# EAGLE board DESIGN7MP_Board (EAGLE 9.3.2)
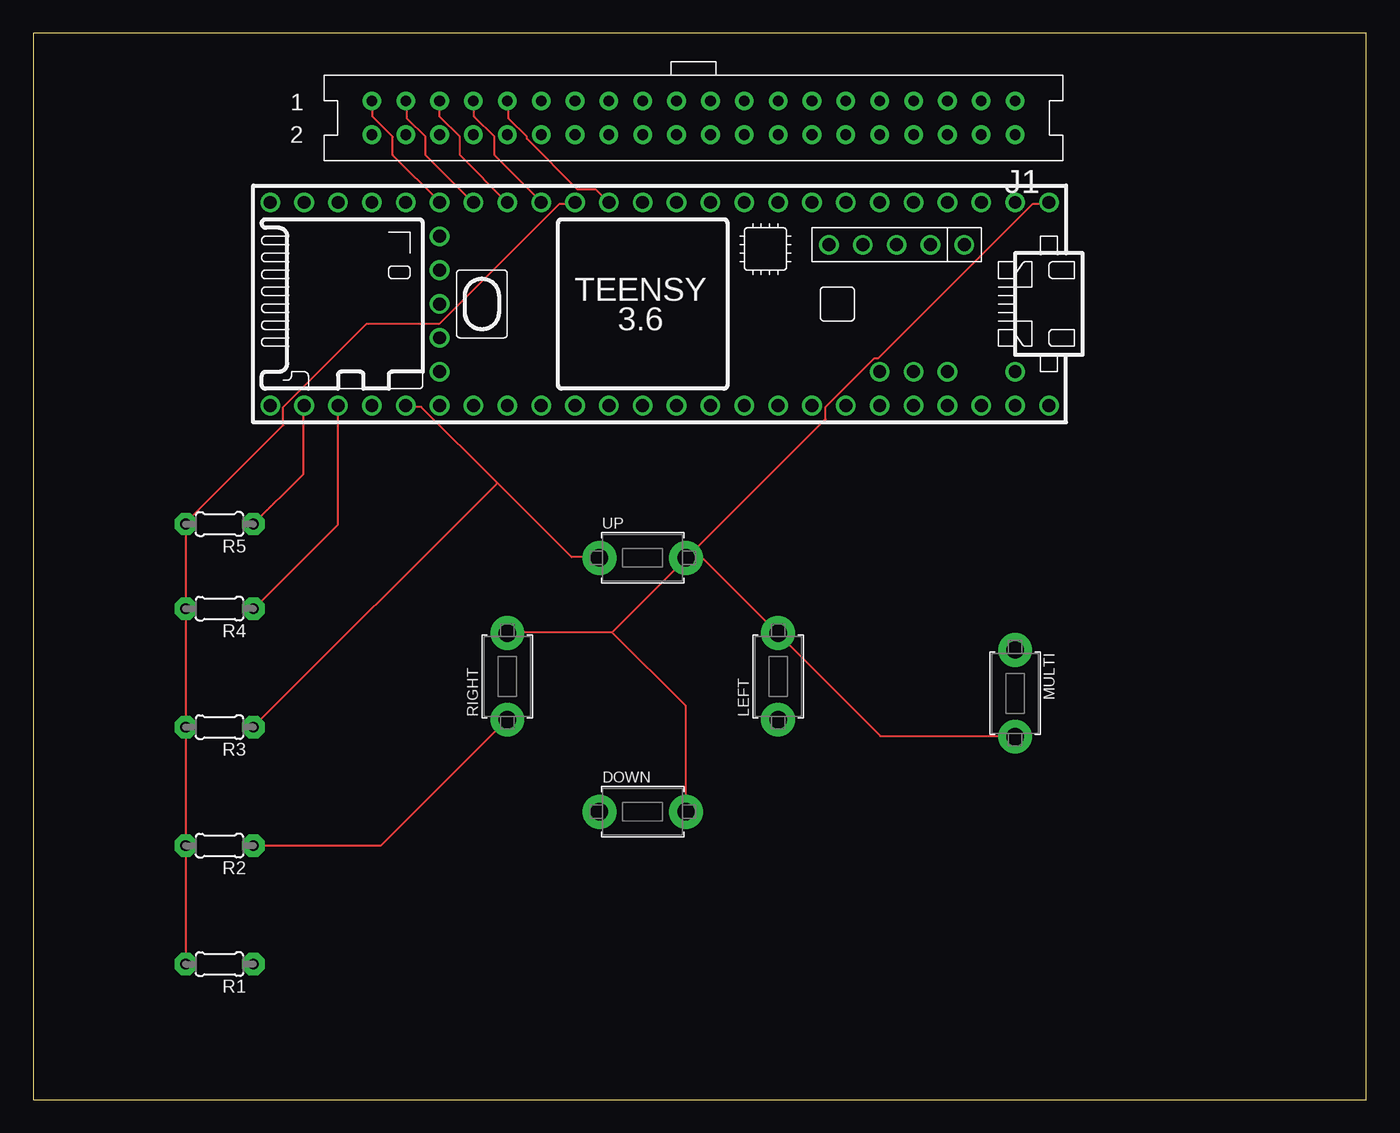
[diagram p0: board, top side]
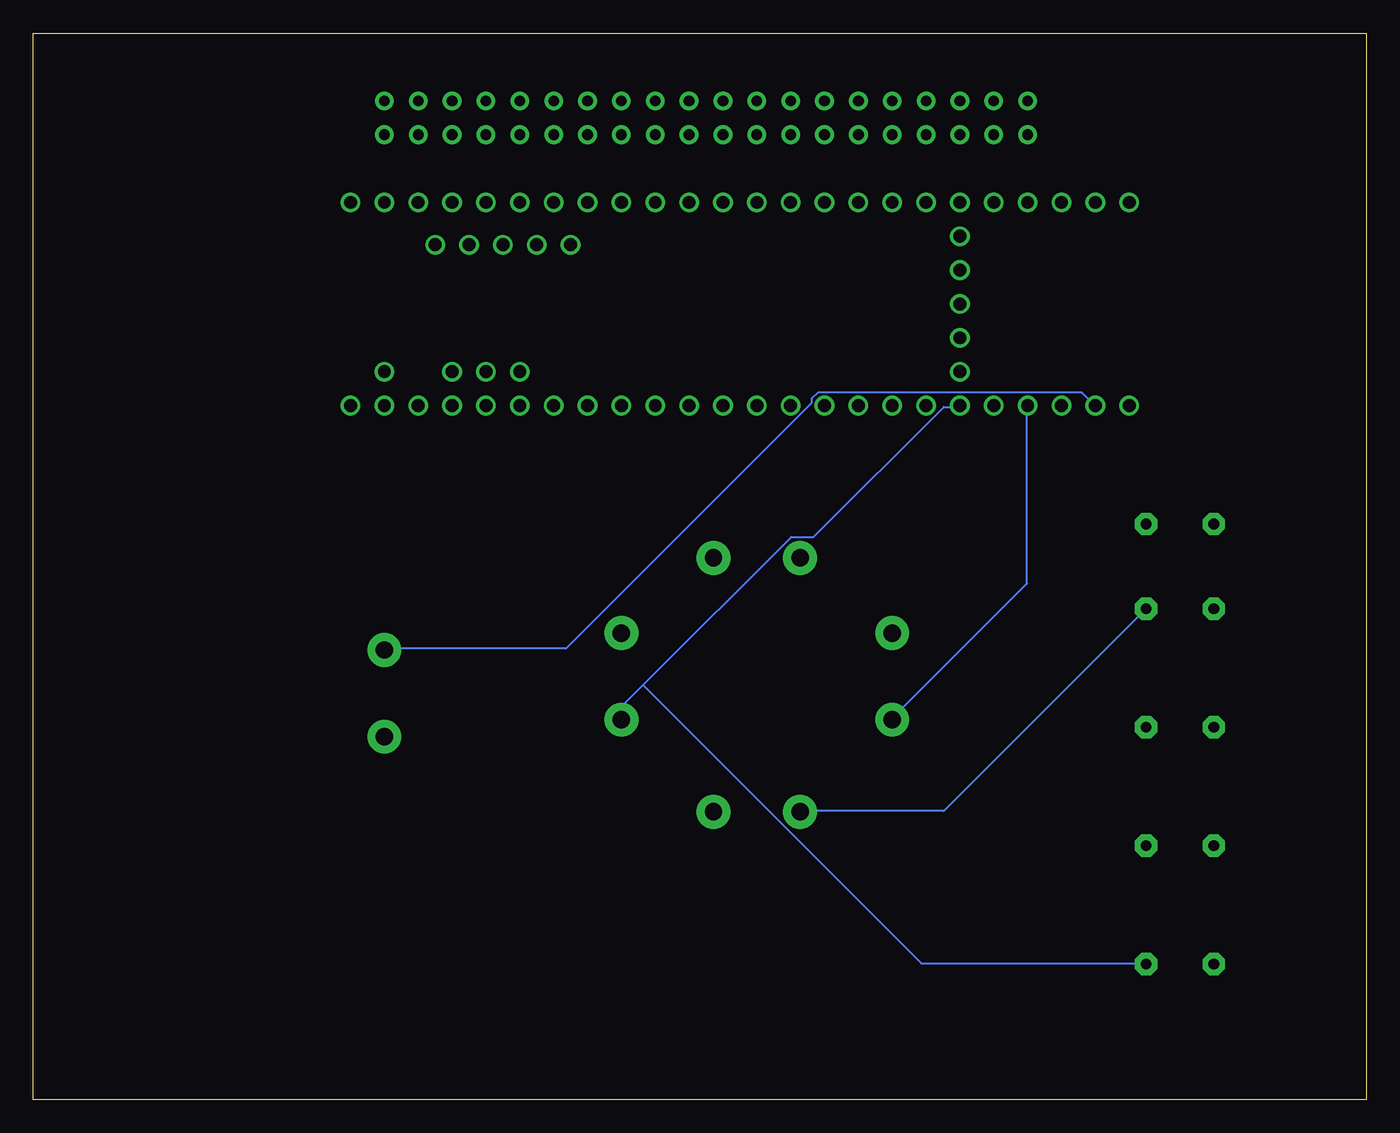
[diagram p1: board, bottom side, seen from below]

Size 100 x 80 mm. Coordinates in mm from the lower left corner, seen from the top.
Outline: 0,0 100,0 100,80 0,80 0,0
Copper layers (1*16): Top 0.035mm / dielectric 1.5mm / Bottom 0.035mm
Design rules "default": minimum track width 6mil, minimum drill 0.35mm, track to track 6mil, track to pad 6mil, pad to pad 6mil, via to via 6mil, smd to smd 6mil, copper to edge 40mil, drill to drill 6mil, minimum pad ring 10mil, minimum via ring 8mil, stop-mask expansion 4mil, vias tented up to drill 0mil, thermal gap 10mil

## Footprints (pad centres in the part's own frame; a part is rotated, then mirrored left to right if it is on the bottom)
TACT_PANA-EVQ = drill 1.3 pad 2.54: P$1 -3.25,0; P$2 3.25,0
S40V = drill 0.8 pad 1.4: 1 24.13,-1.27; 2 24.13,1.27; 3 21.59,-1.27; 4 21.59,1.27; 5 19.05,-1.27; 6 19.05,1.27; 7 16.51,-1.27; 8 16.51,1.27; 9 13.97,-1.27; 10 13.97,1.27; 11 11.43,-1.27; 12 11.43,1.27; 13 8.89,-1.27; 14 8.89,1.27; 15 6.35,-1.27; 16 6.35,1.27; 17 3.81,-1.27; 18 3.81,1.27; 19 1.27,-1.27; 20 1.27,1.27; 21 -1.27,-1.27; 22 -1.27,1.27; 23 -3.81,-1.27; 24 -3.81,1.27; 25 -6.35,-1.27; 26 -6.35,1.27; 27 -8.89,-1.27; 28 -8.89,1.27; 29 -11.43,-1.27; 30 -11.43,1.27; 31 -13.97,-1.27; 32 -13.97,1.27; 33 -16.51,-1.27; 34 -16.51,1.27; 35 -19.05,-1.27; 36 -19.05,1.27; 37 -21.59,-1.27; 38 -21.59,1.27; 39 -24.13,-1.27; 40 -24.13,1.27
0204/5 = drill 0.813 pad 1.676 octagon: 1 -2.54,0; 2 2.54,0
TEENSY_3.5/3.6 = drill 0.965: 0/RX -25.4,-7.62; 1/TX -22.86,-7.62; 2 -20.32,-7.62; 3/CANTX -17.78,-7.62; 3V3 7.62,-7.62; 3V3_2 17.78,-2.54; 3V3_LO -22.86,7.62; 4/CANRX -15.24,-7.62; 5 -12.7,-7.62; 6 -10.16,-7.62; 7 -7.62,-7.62; 8 -5.08,-7.62; 9/CS -2.54,-7.62; 10/CS 0,-7.62; 11/MOSI 2.54,-7.62; 12/MISO 5.08,-7.62; 13/SCK 5.08,7.62; 14/A0 2.54,7.62; 15/A1 0,7.62; 16/A2 -2.54,7.62; 17/A3 -5.08,7.62; 18/A4/SDA -7.62,7.62; 19/A5/SCL -10.16,7.62; 20/A6 -12.7,7.62; 21/A7 -15.24,7.62; 21/DAC0 12.7,7.62; 22/A8 -17.78,7.62; 23/A9 -20.32,7.62; 24 10.16,-7.62; 25 12.7,-7.62; 26 15.24,-7.62; 27 17.78,-7.62; 28 20.32,-7.62; 29 22.86,-7.62; 30 25.4,-7.62; 31/A12 27.94,-7.62; 32/A13 30.48,-7.62; 33/A14 30.48,7.62; 34/A15 27.94,7.62; 35/A16 25.4,7.62; 36/A17 22.86,7.62; 37/A18 20.32,7.62; 38/A19 17.78,7.62; 39/A20 15.24,7.62; A10 -17.78,5.08; A11 -15.24,5.08; A22/DAC1 10.16,7.62; AGND -25.4,7.62; AREF -20.32,5.08; GND -27.94,-7.62; GND2 7.62,7.62; GND3 17.78,0; PROG 17.78,2.54; RESET 17.78,5.08; U5V -21.59,-4.445; UD+ -16.51,-4.445; UD- -19.05,-4.445; UGND1 -13.97,-4.445; UGND2 -11.43,-4.445; VBAT 17.78,-5.08; VIN -27.94,7.62; VUSB -25.4,5.08

## Placement (x,y rotation side)
DOWN  [TACT_PANA-EVQ]  45.72,21.59 0 top
J1  [S40V]  49.53,73.66 180 top
LEFT  [TACT_PANA-EVQ]  55.88,31.75 90 top
MULTI  [TACT_PANA-EVQ]  73.66,30.48 270 top
R1  27k  [0204/5]  13.97,10.16 180 top
R2  27k  [0204/5]  13.97,19.05 180 top
R3  27k  [0204/5]  13.97,27.94 180 top
R4  27k  [0204/5]  13.97,36.83 180 top
R5  27k  [0204/5]  13.97,43.18 180 top
RIGHT  [TACT_PANA-EVQ]  35.56,31.75 90 top
U$1  TEENSY_3.5/3.6  [TEENSY_3.5/3.6]  48.26,59.69 180 top
UP  [TACT_PANA-EVQ]  45.72,40.64 0 top

## Library data of the parts
DOWN LEFT MULTI R1-R5 RIGHT UP = adafruit
J1 = con-3m-skt-header
U$1 = Teensy356

## Nets
N$1: R1.2 R2.2 R3.2 R4.2 R5.2 U$1.3V3
N$2: MULTI.P$1 R5.1 U$1.34/A15
N$3: DOWN.P$1 R4.1 U$1.35/A16
N$4: R2.1 RIGHT.P$1 U$1.36/A17
N$5: R3.1 U$1.37/A18 UP.P$1
N$6: LEFT.P$1 R1.1 U$1.38/A19
N$7: DOWN.P$2 LEFT.P$2 MULTI.P$2 RIGHT.P$2 U$1.GND UP.P$2
N$8: J1.9 U$1.12/MISO
N$9: J1.7 U$1.24
N$10: J1.5 U$1.25
N$11: J1.3 U$1.26
N$12: J1.1 U$1.27

## Tracks (layer width: path | path; a pad name or v marks a point on that pad's centre or on a via)
N$1
  Top 0.152: R1.2 R2.2 R3.2 R4.2 R5.2 11.43,43.28 18.75,50.6 18.75,51.97 24.99,58.22 30.48,58.22 39.47,67.21 40.54,67.21 U$1.3V3
N$2
  Top 0.152: R5.1 20.27,46.94 20.27,51.97 U$1.34/A15
  Bottom 0.152: MULTI.P$1 73.61,33.83 60.05,33.83 41.6,52.27 41.6,52.58 41.15,53.03 21.34,53.03 20.42,52.12 U$1.34/A15
N$3
  Top 0.152: U$1.35/A16 22.86,43.13 16.61,36.88 R4.1
  Bottom 0.152: R4.1 31.7,21.64 42.37,21.64 DOWN.P$1
N$4
  Top 0.152: R2.1 26.06,19.05 35.51,28.5 RIGHT.P$1
  Bottom 0.152: U$1.36/A17 25.45,51.97 25.45,38.71 35.51,28.65 RIGHT.P$1
N$5
  Top 0.152: 34.75,46.33 40.39,40.69 42.37,40.69 UP.P$1 | 34.75,46.33 29.11,51.97 28.04,51.97 U$1.37/A18 | R3.1 34.75,46.18 34.75,46.33
N$6
  Bottom 0.152: 54.25,31.09 55.78,29.57 55.78,28.65 LEFT.P$1 | 54.25,31.09 43.13,42.22 41.45,42.22 31.7,51.97 30.48,51.97 U$1.38/A19 | 54.25,31.09 33.38,10.21 16.61,10.21 R1.1
N$7
  Top 0.152: 49.53,41.15 49.07,40.69 UP.P$2 | 49.53,41.15 59.44,51.05 59.44,51.97 63.09,55.63 63.4,55.63 74.98,67.21 76.2,67.21 U$1.GND | 43.43,35.05 35.66,35.05 RIGHT.P$2 | 43.43,35.05 48.92,40.54 UP.P$2 | 43.43,35.05 48.92,29.57 48.92,21.64 DOWN.P$2 | 49.53,41.15 49.68,41.15 55.78,35.05 LEFT.P$2 55.93,34.9 63.55,27.28 73.61,27.28 MULTI.P$2 | 49.53,41.15 UP.P$2
N$8
  Top 0.152: U$1.12/MISO 42.22,68.28 40.84,68.28 37.03,72.08 37.03,72.24 35.66,73.61 35.66,74.83 J1.9
N$9
  Top 0.152: J1.7 33.07,74.83 33.07,73.76 34.59,72.24 34.59,70.87 38.1,67.36 U$1.24
N$10
  Top 0.152: J1.5 30.48,73.76 32,72.24 32,70.87 U$1.25
N$11
  Top 0.152: J1.3 28.04,74.83 28.04,73.61 29.41,72.24 29.41,70.87 32.92,67.36 U$1.26
N$12
  Top 0.152: J1.1 25.45,74.83 25.45,73.76 26.98,72.24 26.98,70.87 30.48,67.36 U$1.27